# EAGLE board nixie_thermometer (EAGLE 9.6.2)
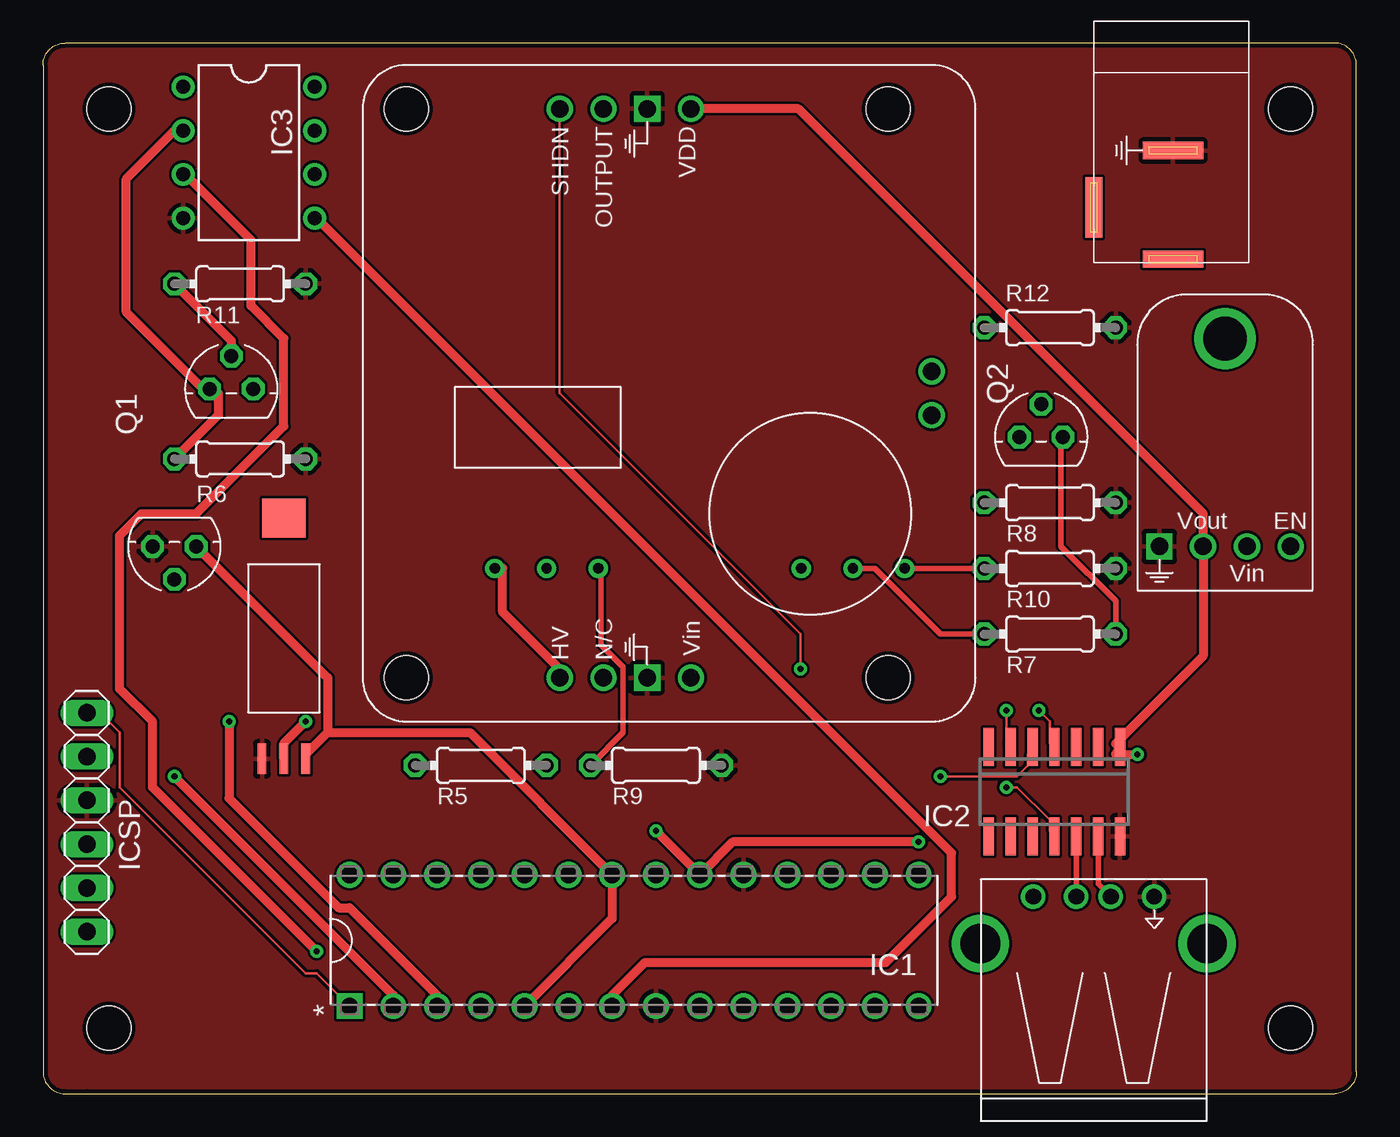
[diagram p0: board, top side]
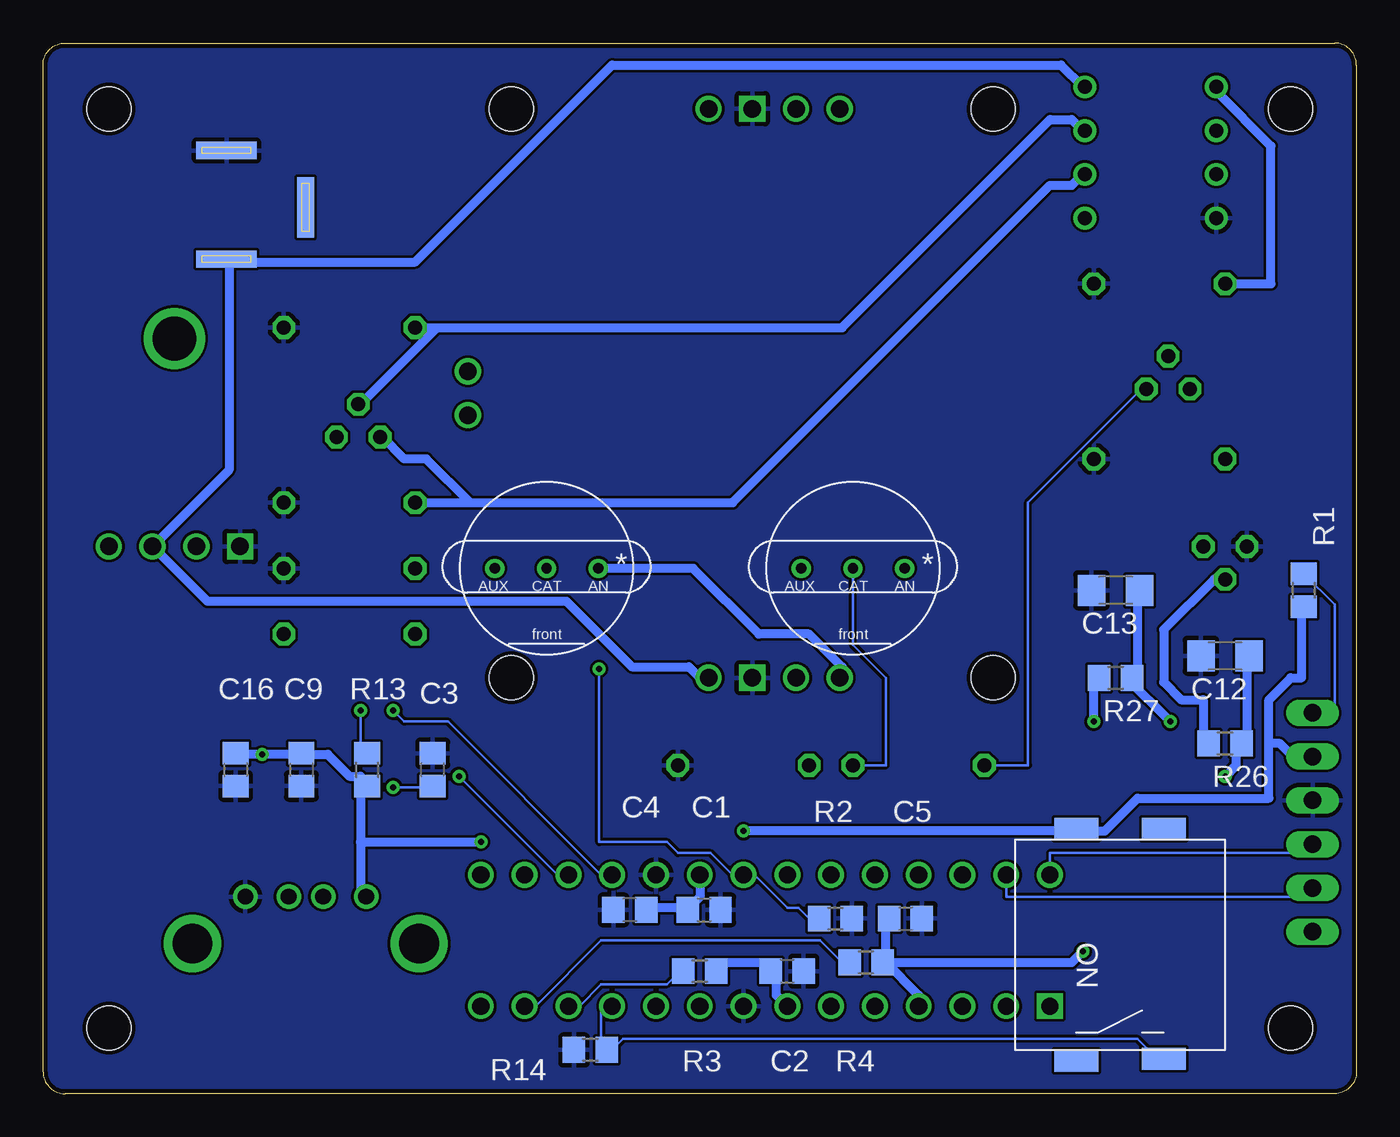
[diagram p1: board, bottom side, seen from below]

Size 76.2 x 60.96 mm. Coordinates in mm from the lower left corner, seen from the top.
Outline: 2.54,0 74.93,0 arc90 76.2,1.27 76.2,59.69 arc90 74.93,60.96 1.27,60.96 arc90 0,59.69 0,1.27 arc90 1.27,0 2.54,0
Copper layers (1*16): Top 0.035mm / dielectric 1.5mm / Bottom 0.035mm
Design rules "default *": minimum track width 6mil, minimum drill 0.35mm, track to track 6mil, track to pad 6mil, pad to pad 6mil, via to via 6mil, smd to smd 6mil, copper to edge 10mil, drill to drill 6mil, minimum pad ring 10mil, minimum via ring 8mil, stop-mask expansion 4mil, vias tented up to drill 0mil, thermal gap 10mil
Net classes: 1 HV: width 0.508 mm, clearance 1.016 mm to class 0; 2 ANALOG: width 0.508 mm, clearance 0.508 mm to class 0, clearance 1.016 mm to class 1, clearance 0.508 mm; 3 PWR: width 0.508 mm, clearance 1.016 mm to class 1, clearance 0.254 mm to class 2, clearance 0.254 mm
Holes 2.54 mm at 3.81,57.15 3.81,3.81 72.39,3.81 72.39,57.15

## Footprints (pad centres in the part's own frame; a part is rotated, then mirrored left to right if it is on the bottom)
TO-92 = drill 0.813 octagon: 1 -1.27,0; 2 0,1.905; 3 1.27,0
C0805 = smd 1.3 x 1.5: 1 -0.95,0; 2 0.95,0
C1206 = smd 1.6 x 1.8: 1 -1.4,0; 2 1.4,0
HIH5030 = smd 0.508 x 1.778: GND -1.27,-6.985; VCC 1.27,-6.985; VO 0,-6.985 | smd 2.54 x 2.286: P$1 0,6.985
DIP-28 = drill 0.991 square: 1 -7.62,33.02 | drill 0.991: 2 -7.62,30.48; 3 -7.62,27.94; 4 -7.62,25.4; 5 -7.62,22.86; 6 -7.62,20.32; 7 -7.62,17.78; 8 -7.62,15.24; 9 -7.62,12.7; 10 -7.62,10.16; 11 -7.62,7.62; 12 -7.62,5.08; 13 -7.62,2.54; 14 -7.62,0; 15 0,0; 16 0,2.54; 17 0,5.08; 18 0,7.62; 19 0,10.16; 20 0,12.7; 21 0,15.24; 22 0,17.78; 23 0,20.32; 24 0,22.86; 25 0,25.4; 26 0,27.94; 27 0,30.48; 28 0,33.02
SOIC-14 = smd 0.6 x 2.2: 1 -3.81,-2.6; 2 -2.54,-2.6; 3 -1.27,-2.6; 4 0,-2.6; 5 1.27,-2.6; 6 2.54,-2.6; 7 3.81,-2.6; 8 3.81,2.6; 9 2.54,2.6; 10 1.27,2.6; 11 0,2.6; 12 -1.27,2.6; 13 -2.54,2.6; 14 -3.81,2.6
DIP-8 = drill 0.813 pad 1.27: 1 -3.81,-3.81; 2 -1.27,-3.81; 3 1.27,-3.81; 4 3.81,-3.81; 5 3.81,3.81; 6 1.27,3.81; 7 -1.27,3.81; 8 -3.81,3.81
1X06 = drill 1.016 long: 1 -6.35,0; 2 -3.81,0; 3 -1.27,0; 4 1.27,0; 5 3.81,0; 6 6.35,0
DC-JACK = smd 1 x 3.5 bottom: GND-BOT 7.5,4.6; POW-BOT 13.8,4.6 | smd 1 x 3.5: GND-TOP 7.5,4.6; POW-TOP 13.8,4.6 | smd 3.5 x 1 bottom: NC-BOT 10.8,0 | smd 3.5 x 1: NC-TOP 10.8,0
R0805 = smd 1.3 x 1.5: 1 -0.95,0; 2 0.95,0
R0204/7 = drill 0.813 octagon: 1 -3.81,0; 2 3.81,0
MPM3610-ADAFRUIT-MODULE = drill 1.016: EN 3.81,2.54; VIN 1.27,2.54; VOUT -1.27,2.54 | drill 1.016 square: GND -3.81,2.54 | drill 2.54: P$1 0,14.605
SMPS-HV-MOD-MODULE = drill 1.016: EX-IND0 17.78,33.02; EX-INT1 20.32,33.02; HV 35.56,11.43; OUTPUT 2.54,13.97; P$6 35.56,13.97; SHDN 2.54,11.43; VDD 2.54,19.05; VIN 35.56,19.05 | drill 1.016 square: GND 2.54,16.51; GND-HV 35.56,16.51 | hole 2.54: 2.54,2.54; 35.56,2.54; 35.56,30.48; 2.54,30.48
IN-13 = drill 0.6: AN -3,0; AUX 3,0; CAT 0,0
SW-SPST-PUSHBUTTON-UNKNOWN-SMD = smd 1.27 x 2.54: P$5 6.731,2.54; P$6 6.731,-2.54; P$7 -6.731,2.54; P$8 -6.604,-2.54
USB-MILLMAX-896-43-004-90 = drill 0.914: D+ 0.991,0; D- -1.016,0; GND 3.505,0; VCC -3.505,0 | drill 2.311: P$5 -6.579,-2.718; P$6 6.579,-2.718

## Placement (x,y rotation side)
AD22100  AD22100  [TO-92]  7.62,31.75 180 top
C1  10u  [C0805]  37.85,10.67 0 bottom
C2  100n  [C0805]  33.02,7.11 0 bottom
C3  0.47u  [C0805]  53.59,18.8 90 bottom
C4  0.1u  [C0805]  42.16,10.67 180 bottom
C5  100n  [C0805]  26.16,10.16 0 bottom
C9  0.1u  [C0805]  61.21,18.8 270 bottom
C12  0.1u  [C1206]  7.62,25.4 180 bottom
C13  0.1u  [C1206]  13.97,29.21 180 bottom
C16  10u  [C0805]  65.02,18.8 270 bottom
HIH5030  HIH5030  [HIH5030]  13.97,26.42 0 top
IC1  PIC16F1788  [DIP-28]  50.8,12.7 90 top
IC2  MCP2221  [SOIC-14]  58.67,17.53 180 top
IC3  LM358  [DIP-8]  11.94,54.61 270 top
ICSP  [1X06]  2.54,15.75 270 top
J1  [DC-JACK]  60.96,62.23 270 top
Q1  VN10KN3  [TO-92]  10.92,40.89 0 top
Q2  VN10KN3  [TO-92]  57.91,38.1 0 top
R1  10k  [R0805]  3.05,29.21 90 bottom
R2  10k  [R0805]  30.23,10.16 180 bottom
R3  10k  [R0805]  38.1,7.11 0 bottom
R4  10k  [R0805]  28.45,7.62 0 bottom
R5  4.7k  [R0204/7]  25.4,19.05 0 top
R6  1k  [R0204/7]  11.43,36.83 180 top
R7  4.7k  [R0204/7]  58.42,26.67 180 top
R8  1k  [R0204/7]  58.42,34.29 180 top
R9  360k  [R0204/7]  35.56,19.05 180 top
R10  360k  [R0204/7]  58.42,30.48 180 top
R11  10k  [R0204/7]  11.43,46.99 180 top
R12  10k  [R0204/7]  58.42,44.45 180 top
R13  1k  [R0805]  57.4,18.8 90 bottom
R14  10k  [R0805]  44.45,2.54 0 bottom
R26  10k  [R0805]  7.62,20.32 180 bottom
R27  10k  [R0805]  13.97,24.13 180 bottom
U$1  MPM3610-ADAFRUIT  [MPM3610-ADAFRUIT-MODULE]  68.58,29.21 0 top
U$2  SMPS-HV-MODULE  [SMPS-HV-MOD-MODULE]  18.54,59.69 270 top
U$3  IN-13  [IN-13]  29.21,30.48 180 bottom
U$4  IN-13  [IN-13]  46.99,30.48 180 bottom
U$5  SW-SPST-PUSHBUTTONSMD  [SW-SPST-PUSHBUTTON-UNKNOWN-SMD]  13.72,8.64 90 bottom
USB$2  USB-MILLMAX-896-43-004  [USB-MILLMAX-896-43-004-90]  60.96,11.43 0 top

## Library data of the parts
AD22100 HIH5030 IC2 IC3 U$1 U$2 = IC
C1-C5 C9 C16 = rcl; SPICEPREFIX: C
C12 C13 R1-R14 R26 R27 = RLC
IC1 = IC; MPN: PIC16F876-04/SP; OC_FARNELL: 1523957; OC_NEWARK: 23C5083; PACKAGE: DIP-28; SUPPLIER: Microchip
ICSP = pinhead
J1 U$5 USB$2 = Connector
Q1 Q2 = Transistor
U$3 U$4 = Tubes

## Nets
CHASSIS: USB$2.P$5 USB$2.P$6
D+: IC2.13 USB$2.D+
D-: IC2.12 USB$2.D-
GND: AD22100.3 C1.2 C2.2 C3.2 C4.2 C5.2 C9.2 C12.2 C13.2 C16.2 HIH5030.GND IC1.8 IC1.19 IC2.14 IC3.4 ICSP.3 J1.GND-BOT J1.GND-TOP R2.1 R6.1 R8.1 R9.1 R10.1 R11.1 R12.1 R14.1 U$1.GND U$2.GND U$2.GND-HV USB$2.GND
HUMID-RAW [ANALOG]: HIH5030.VO R27.2
HUMIDITY [ANALOG]: C13.1 IC1.3 R27.1
HV [HV]: U$2.HV U$3.AN U$4.AN
HV-CON: IC1.21 R2.2 U$2.SHDN
N$2: IC1.11 R14.2 U$5.P$6 U$5.P$8
N$6: Q1.3 R5.1
N$7: Q2.3 R7.1
N$10: C3.1 IC2.11
N$11: R9.2 U$3.AUX
N$12: R10.2 U$4.AUX
N$13: R5.2 U$3.CAT
N$15: R7.2 U$4.CAT
N$18: IC2.4 R13.2
NX1-DRIVE [ANALOG]: IC3.1 Q1.2 R11.2
NX1-FB [ANALOG]: IC3.2 Q1.1 R6.2
NX2-DRIVE [ANALOG]: IC3.7 Q2.2 R12.2
NX2-FB [ANALOG]: IC3.6 Q2.1 R8.2
PGCLK: IC1.27 ICSP.5
PGDAT: IC1.28 ICSP.4
PSMC1B: IC1.13 R4.1
PSMC3B: IC1.12 R3.1
RX: IC1.18 IC2.6
SENSOR-POWER [PWR]: AD22100.1 HIH5030.VCC IC1.5 IC1.22
TEMP [ANALOG]: C12.1 IC1.2 R26.1
TEMP-RAW [ANALOG]: AD22100.2 R26.2
TX: IC1.17 IC2.5
V-HUMIDITY [ANALOG]: C2.1 IC1.7 IC3.5 R3.2
V-TEMP [ANALOG]: C5.1 IC1.4 IC3.3 R4.2
VDD [PWR]: C1.1 C4.1 C9.1 C16.1 IC1.20 IC2.1 ICSP.2 R1.1 R13.1 U$1.VOUT U$2.VDD U$5.P$5 U$5.P$7 USB$2.VCC
VIN [PWR]: IC3.8 J1.POW-BOT J1.POW-TOP U$1.VIN U$2.VIN
~MCLR: IC1.1 ICSP.1 R1.2

## Tracks (layer width: path | path; a pad name or v marks a point on that pad's centre or on a via)
D+
  Top 0.305: USB$2.D+ 61.21,12.17 IC2.13
D-
  Top 0.305: USB$2.D- IC2.12
GND
  pour Top: -1.27,67.31 -1.27,-2.54 25.4,-2.54 78.74,-2.54 78.74,67.31
  pour Bottom: -2.54,68.58 80.01,68.58 80.01,-3.81 -2.54,-3.81
HUMID-RAW  (via drill 0.35)
  Top 0.508: v15.24,21.59 13.97,20.32 HIH5030.VO
  Bottom 0.508: v15.24,21.59 15.24,24.13 R27.2
HUMIDITY  (via drill 0.35)
  Top 0.508: IC1.3 22.86,5.71 17.78,10.8 17.15,10.8 10.8,17.14 v10.8,21.59
  Bottom 0.508: C13.1 12.7,29.21 12.7,24.13 R27.1 13.34,24.13 v10.8,21.59
HV
  Top 0.508: U$3.AN 26.67,30.48 26.67,27.94 30.48,24.13 U$2.HV
  Bottom 0.508: U$4.AN 38.48,30.48 34.67,26.67 31.75,26.67 29.84,24.77 29.84,24.13 U$2.HV
HV-CON  (via drill 0.35)
  Top 0.152: v43.94,24.64 43.94,26.67 29.97,40.64 U$2.SHDN
  Bottom 0.152: R2.2 31.75,10.16 32.39,10.8 33.02,10.8 34.93,12.7 IC1.21 36.2,12.7 37.47,13.97 39.37,13.97 40.01,14.61 43.94,14.61 v43.94,24.64
N$2
  Bottom 0.152: IC1.11 43.81,5.08 43.81,2.54 R14.2 43.18,2.54 42.55,3.18 12.7,3.18 12.07,2.54 11.43,2.54 U$5.P$8
N$6
  Bottom 0.152: R5.1 19.05,19.05 19.05,34.29 12.7,40.64 Q1.3
N$7
  Top 0.152: 59.05,38.1 Q2.3
  Top 0.305: R7.1 62.23,28.57 59.05,31.75 59.05,38.1
N$10  (via drill 0.35)
  Top 0.152: v55.88,17.78 56.52,17.78 58.42,15.88 58.42,15.24 IC2.11
  Bottom 0.152: v55.88,17.78 53.98,17.78 C3.1
N$11
  Top 0.152: 32.39,30.48 U$3.AUX
  Top 0.305: 32.39,30.48 32.39,26.04 33.66,24.77 33.66,20.95 R9.2
N$12
  Top 0.305: R10.2 U$4.AUX
N$13
  Bottom 0.152: U$3.CAT 29.21,26.04 27.3,24.13 27.3,19.05 R5.2
N$15
  Top 0.305: U$4.CAT 48.26,30.48 52.07,26.67 R7.2
N$18  (via drill 0.35)
  Top 0.152: v57.78,22.23 58.42,21.59 58.42,20.32 IC2.4
  Bottom 0.152: v57.78,22.23 57.78,20.32 R13.2
NX1-DRIVE
  Top 0.508: R11.2 10.92,43.69 Q1.2
  Bottom 0.508: IC3.1 8.13,58.17 4.95,54.99 4.95,46.99 R11.2
NX1-FB
  Top 0.508: R6.2 10.16,39.37 10.16,40.64 Q1.1 9.53,40.64 4.83,45.34 4.83,53.09 7.62,55.88 IC3.2
NX2-DRIVE
  Bottom 0.508: R12.2 53.34,44.45 | 53.34,44.45 29.84,44.45 17.78,56.52 16.51,56.52 15.88,55.88 IC3.7 | 53.34,44.45 57.78,40.01 Q2.2
NX2-FB
  Bottom 0.508: R8.2 51.44,34.29 | 51.44,34.29 36.2,34.29 17.78,52.7 16.51,52.7 15.88,53.34 IC3.6 | 51.44,34.29 53.98,36.83 55.25,36.83 56.52,38.1 Q2.1
PGCLK
  Bottom 0.152: IC1.27 20.32,11.43 2.54,11.43 ICSP.5
PGDAT
  Bottom 0.152: IC1.28 17.78,13.97 2.54,13.97 ICSP.4
PSMC1B
  Bottom 0.152: IC1.13 47.62,5.08 43.81,8.89 31.12,8.89 29.84,7.62 R4.1
PSMC3B
  Bottom 0.152: IC1.12 45.09,5.08 43.81,6.35 40.01,6.35 39.37,6.98 R3.1
RX  (via drill 0.35)
  Top 0.152: v55.88,22.23 55.88,20.32 IC2.6
  Bottom 0.152: v55.88,22.23 55.25,21.59 52.7,21.59 43.81,12.7 IC1.18
SENSOR-POWER
  Top 0.508: IC1.5 33.02,10.16 IC1.22 24.77,20.95 16.51,20.95 | 16.51,20.95 15.24,19.69 HIH5030.VCC | 16.51,20.95 16.51,24.13 AD22100.1
TEMP  (via drill 0.35)
  Top 0.508: IC1.2 20.32,5.71 v7.62,18.41
  Bottom 0.508: C12.1 6.35,25.4 6.35,20.32 R26.1 6.99,20.32 6.99,19.05 v7.62,18.41
TEMP-RAW
  Bottom 0.508: AD22100.2 8.26,29.84 11.18,26.92 11.18,23.88 10.16,22.86 8.89,22.86 8.89,20.32 R26.2
TX  (via drill 0.35)
  Top 0.152: v52.07,18.41 56.52,18.41 57.15,19.05 57.15,19.69 IC2.5
  Bottom 0.152: v52.07,18.41 46.36,12.7 IC1.17
V-HUMIDITY
  Top 0.508: IC1.7 33.02,5.71 34.93,7.62 48.9,7.62 52.7,11.43 52.7,13.97 15.88,50.8 IC3.5
  Bottom 0.508: R3.2 36.83,7.62 34.29,7.62 C2.1 33.66,6.98 33.66,5.71 IC1.7
V-TEMP  (via drill 0.35)
  Top 0.508: v15.88,8.25 6.35,17.78 6.35,21.59 4.45,23.5 4.45,32.38 5.72,33.66 8.89,33.66 13.97,38.73 13.97,43.81 12.07,45.72 12.07,49.53 8.26,53.34 IC3.3
  Bottom 0.508: 27.3,7.62 27.3,10.16 C5.1 | 27.3,7.62 25.4,5.71 IC1.4 | v15.88,8.25 16.51,7.62 27.3,7.62 | 27.3,7.62 R4.2
VDD  (via drill 0.35)
  Top 0.508: v35.56,15.24 IC1.20 40.01,14.61 v50.8,14.61 | U$2.VDD 43.81,57.15 67.31,33.66 U$1.VOUT 67.31,25.4 62.23,20.32 IC2.1 62.23,19.69 v63.5,19.69
  Bottom 0.508: 5.08,20.32 5.08,22.86 3.81,24.13 3.18,24.13 3.18,27.94 R1.1 | 5.08,20.32 4.45,20.32 3.81,19.69 2.54,19.69 ICSP.2 | IC1.20 38.1,11.43 38.73,10.8 C1.1 39.37,10.8 40.64,10.8 C4.1 | v35.56,15.24 16.51,15.24 U$5.P$5 15.88,15.24 14.61,15.24 12.7,17.14 5.08,17.14 5.08,20.32 | C16.1 64.77,19.69 v63.5,19.69 61.59,19.69 C9.1 60.96,19.69 59.69,19.69 58.42,18.41 57.78,18.41 R13.1 57.78,17.78 57.78,14.61 | 57.78,14.61 57.78,11.43 USB$2.VCC | 57.78,14.61 v50.8,14.61
VIN
  Bottom 0.508: U$2.VIN 38.1,24.13 38.73,24.77 42.04,24.77 45.85,28.57 66.67,28.57 U$1.VIN 65.41,36.2 65.41,48.26 | 65.41,48.26 54.61,48.26 43.18,59.69 17.15,59.69 15.88,58.42 IC3.8 | 65.41,48.26 J1.POW-TOP
~MCLR
  Top 0.152: IC1.1 15.88,6.98 15.24,6.98 4.45,17.78 4.45,20.95 3.81,21.59 2.54,21.59 ICSP.1
  Bottom 0.152: R1.2 1.27,28.38 1.27,22.23 2.54,22.23 ICSP.1

## Text on the board
tDocu: *
bDocu: *